# EAGLE board megacommand_1_0_1a (EAGLE 7.6.0)
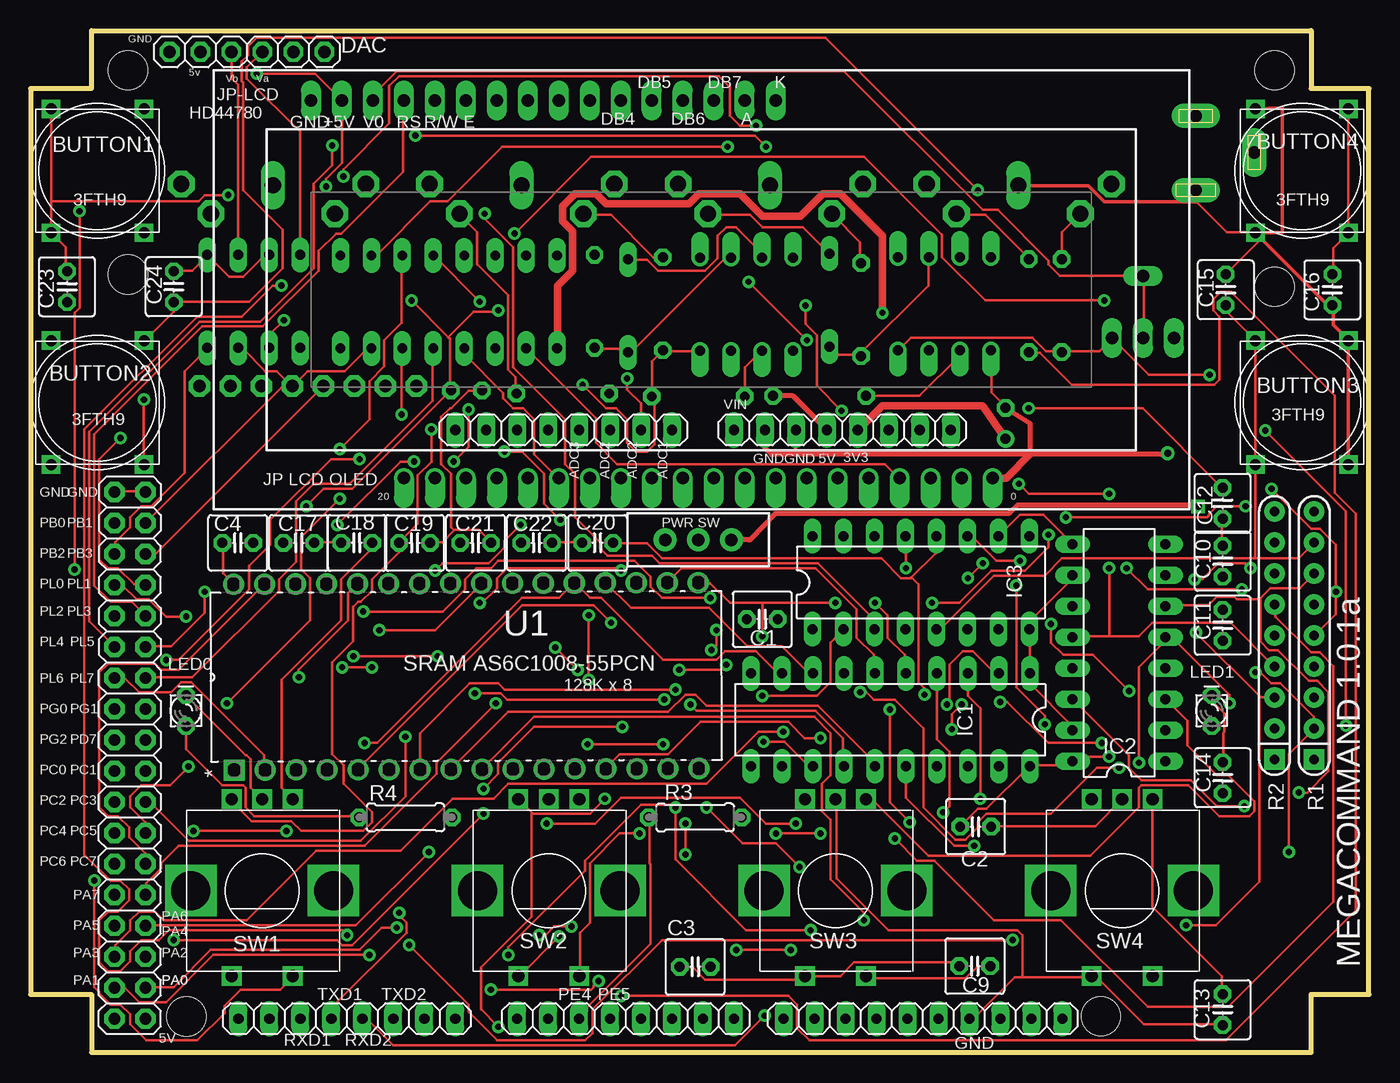
[diagram p0: board, top side]
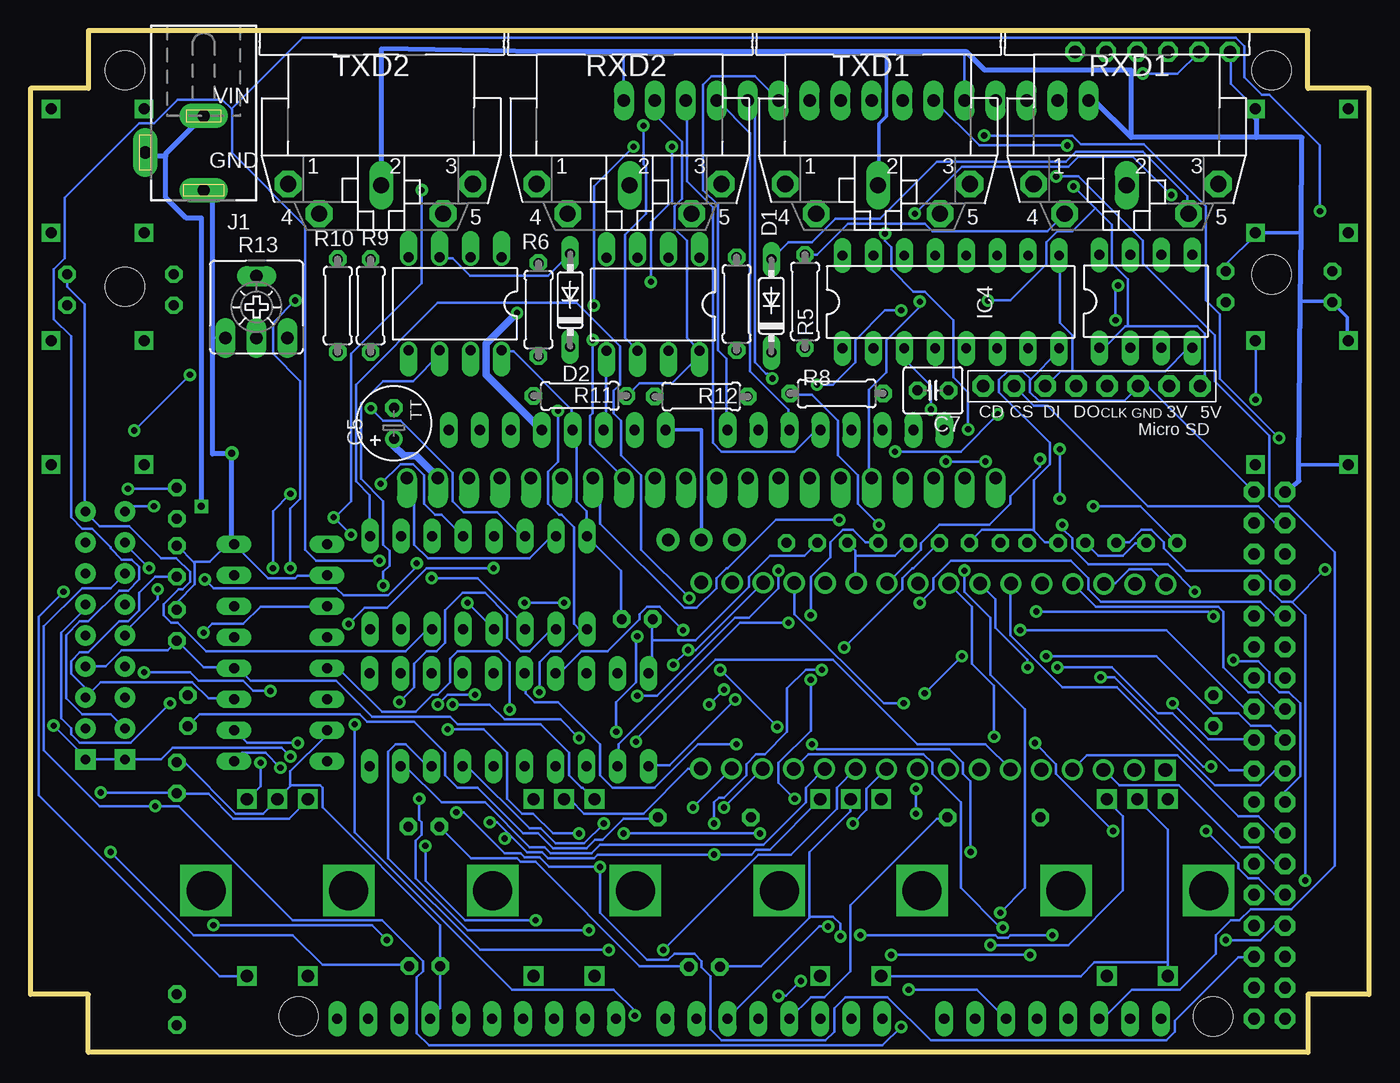
[diagram p1: board, bottom side, seen from below]

Size 109.75 x 83.75 mm. Coordinates in mm from the lower left corner, seen from the top.
Outline: 0,79 0,4.75 5,4.75 5,0 105,0 105,4.75 109.75,4.75 109.75,79 105,79 105,83.75 5,83.75 5,79 0,79
Copper layers (1*16): Top 0.035mm / dielectric 1.5mm / Bottom 0.035mm
Design rules "SparkFun": minimum track width 8mil, minimum drill 20mil, track to track 8mil, track to pad 8mil, pad to pad 8mil, via to via 8mil, smd to smd 8mil, copper to edge 10mil, drill to drill 8mil, minimum pad ring 12mil, minimum via ring 10mil, stop-mask expansion 4mil, vias tented up to drill 25mil, thermal gap 10mil
Net classes: 0 default: width 0.203 mm, drill 0.406 mm, clearance 0.203 mm; 1 power: width 0.61 mm, drill 0.406 mm, clearance 0.203 mm; 2 gnd: width 0.305 mm, drill 0.406 mm, clearance 0.203 mm; 3 power usb: width 0.508 mm, drill 0.406 mm, clearance 0.203 mm
Holes 3.2 mm at 87.77,2.95 12.79,2.92 8,63.75 102,62.75 8,80.5 102,80.5

## Footprints (pad centres in the part's own frame; a part is rotated, then mirrored left to right if it is on the bottom)
1X08 = drill 0.85 pad 1.422 long: 1 -8.89,0; 2 -6.35,0; 3 -3.81,0; 4 -1.27,0; 5 1.27,0; 6 3.81,0; 7 6.35,0; 8 8.89,0
3FT = drill 0.9 square: P$1 5.08,3.81; P$2 -5.08,3.81; P$3 5.08,-3.81; P$4 -5.08,-3.81
C025-050X050 = drill 0.813 octagon: 1 -1.27,0; 2 1.27,0
TT2D6 = drill 0.813: + -1.27,0 | drill 0.813 octagon: - 1.27,0
C025-040X050 = drill 0.813 octagon: 1 -1.27,0; 2 1.27,0
DO35-7 = drill 0.813 long: A 3.81,0; C -3.81,0
1X06 = drill 1.016 octagon: 1 -6.35,0; 2 -3.81,0; 3 -1.27,0; 4 1.27,0; 5 3.81,0; 6 6.35,0
DIL20 = drill 0.813 long: 1 -11.43,-3.81; 2 -8.89,-3.81; 3 -6.35,-3.81; 4 -3.81,-3.81; 5 -1.27,-3.81; 6 1.27,-3.81; 7 3.81,-3.81; 8 6.35,-3.81; 9 8.89,-3.81; 10 11.43,-3.81; 11 11.43,3.81; 12 8.89,3.81; 13 6.35,3.81; 14 3.81,3.81; 15 1.27,3.81; 16 -1.27,3.81; 17 -3.81,3.81; 18 -6.35,3.81; 19 -8.89,3.81; 20 -11.43,3.81
DIL16 = drill 0.813 long: 1 -8.89,-3.81; 2 -6.35,-3.81; 3 -3.81,-3.81; 4 -1.27,-3.81; 5 1.27,-3.81; 6 3.81,-3.81; 7 6.35,-3.81; 8 8.89,-3.81; 9 8.89,3.81; 10 6.35,3.81; 11 3.81,3.81; 12 1.27,3.81; 13 -1.27,3.81; 14 -3.81,3.81; 15 -6.35,3.81; 16 -8.89,3.81
DIL08 = drill 0.813 long: 1 -3.81,-3.81; 2 -1.27,-3.81; 3 1.27,-3.81; 4 3.81,-3.81; 5 3.81,3.81; 6 1.27,3.81; 7 -1.27,3.81; 8 -3.81,3.81
DCJ0202 = drill 1 pad 2 long: 1 0,3.1; 2 4.8,0; 3 0,-3
1X08-BIG = drill 1.016 pad 1.778 octagon: 1 -8.89,0; 2 -6.35,0; 3 -3.81,0; 4 -1.27,0; 5 1.27,0; 6 3.81,0; 7 6.35,0; 8 8.89,0
1X10 = drill 0.85 pad 1.422 long: 1 -11.43,0; 2 -8.89,0; 3 -6.35,0; 4 -3.81,0; 5 -1.27,0; 6 1.27,0; 7 3.81,0; 8 6.35,0; 9 8.89,0; 10 11.43,0
LED_LD260 = drill 0.813 octagon: A -1.27,0; K 1.27,0
DIL08' = drill 0.813 offset: 1 -3.81,-3.81; 2 -1.27,-3.81; 3 1.27,-3.81; 4 3.81,-3.81; 5 3.81,3.81; 6 1.27,3.81; 7 -1.27,3.81; 8 -3.81,3.81
RPACK-SIP-PTH-8 = drill 0.8 pad 1.676 square: P$1 0,0 | drill 0.8 pad 1.676: P$2 0,-2.54; P$3 0,-5.08; P$4 0,-7.62; P$5 0,-10.16; P$6 0,-12.7; P$7 0,-15.24; P$8 0,-17.78; P$9 0,-20.32
0207/7 = drill 0.813 octagon: 1 -3.81,0; 2 3.81,0
CA6V = drill 1.016 long: A -2.54,-2.54; E 2.54,-2.54; S 0,2.54; S1 0,-2.54
SWITCH-SPDT_KIT = drill 1.016 pad 1.88: 1 0,2.718; 2 0,0; 3 0,-2.718
ALPS_EC12E_SW = drill 1 square: A -2.5,-7.5; B 2.5,-7.5; C 0,-7.5; D -2.5,7; E 2.5,7 | drill 3.2 square: GND1 -5.85,0; GND2 5.85,0
DIP254P1524X393-32 = drill 1.118 square: 1 -15.24,38.1 | drill 1.118: 2 -15.24,35.56; 3 -15.24,33.02; 4 -15.24,30.48; 5 -15.24,27.94; 6 -15.24,25.4; 7 -15.24,22.86; 8 -15.24,20.32; 9 -15.24,17.78; 10 -15.24,15.24; 11 -15.24,12.7; 12 -15.24,10.16; 13 -15.24,7.62; 14 -15.24,5.08; 15 -15.24,2.54; 16 -15.24,0; 17 0,0; 18 0,2.54; 19 0,5.08; 20 0,7.62; 21 0,10.16; 22 0,12.7; 23 0,15.24; 24 0,17.78; 25 0,20.32; 26 0,22.86; 27 0,25.4; 28 0,27.94; 29 0,30.48; 30 0,33.02; 31 0,35.56; 32 0,38.1
LCD-16X2-3HOLES = drill 1.016 long: 1 -32,15.5; 2 -29.46,15.5; 3 -26.92,15.5; 4 -24.38,15.5; 5 -21.84,15.5; 6 -19.3,15.5; 7 -16.76,15.5; 8 -14.22,15.5; 9 -11.68,15.5; 10 -9.14,15.5; 11 -6.6,15.5; 12 -4.06,15.5; 13 -1.52,15.5; 14 1.02,15.5; 15 3.56,15.5; 16 6.1,15.5
20PIN = drill 1.016 offset: P$1 -24.13,0; P$2 -21.59,0; P$3 -19.05,0; P$4 -16.51,0; P$5 -13.97,0; P$6 -11.43,0; P$7 -8.89,0; P$8 -6.35,0; P$9 -3.81,0; P$10 -1.27,0; P$11 1.27,0; P$12 3.81,0; P$13 6.35,0; P$14 8.89,0; P$15 11.43,0; P$16 13.97,0; P$17 16.51,0; P$18 19.05,0; P$19 21.59,0; P$20 24.13,0
CP-2350 = drill 1.321 pad 2.184 octagon: 1 7.62,12.58; 3 -7.52,12.58; 4 5.08,15.02; 5 -5.08,15.02 | drill 1.321 long: 2 0,12.68
2X18 = drill 0.95 pad 1.676 octagon: 1 -21.59,-1.27; 2 -21.59,1.27; 3 -19.05,-1.27; 4 -19.05,1.27; 5 -16.51,-1.27; 6 -16.51,1.27; 7 -13.97,-1.27; 8 -13.97,1.27; 9 -11.43,-1.27; 10 -11.43,1.27; 11 -8.89,-1.27; 12 -8.89,1.27; 13 -6.35,-1.27; 14 -6.35,1.27; 15 -3.81,-1.27; 16 -3.81,1.27; 17 -1.27,-1.27; 18 -1.27,1.27; 19 1.27,-1.27; 20 1.27,1.27; 21 3.81,-1.27; 22 3.81,1.27; 23 6.35,-1.27; 24 6.35,1.27; 25 8.89,-1.27; 26 8.89,1.27; 27 11.43,-1.27; 28 11.43,1.27; 29 13.97,-1.27; 30 13.97,1.27; 31 16.51,-1.27; 32 16.51,1.27; 33 19.05,-1.27; 34 19.05,1.27; 35 21.59,-1.27; 36 21.59,1.27

## Placement (x,y rotation side)
ADCL  8x1F-H8.5  [1X08]  43.71,51.01 180 top
BUTTON1  3FT1D  [3FT]  5.5,72.25 270 top
BUTTON2  3FT1D  [3FT]  5.5,53.25 90 top
BUTTON3  3FT1D  [3FT]  104.25,53.25 90 top
BUTTON4  3FT1D  [3FT]  104.25,72.25 90 top
C1  0.1uF  [C025-050X050]  60,35.5 0 top
C2  0.1uF  [C025-050X050]  77.5,18.5 180 top
C3  0.1uF  [C025-050X050]  54.5,7 0 top
C4  0.1uF  [C025-050X050]  17,41.75 180 top
C5  220uF  [TT2D6]  79.95,51.55 90 bottom
C7  0.1uF  [C025-040X050]  35.75,54.25 180 bottom
C9  0.1uF  [C025-050X050]  77.42,7.07 0 top
C10  0.1uF  [C025-050X050]  97.75,40.25 270 top
C11  0.1uF  [C025-050X050]  97.75,35 270 top
C12  0.1uF  [C025-050X050]  97.75,45 90 top
C13  0.1uF  [C025-050X050]  97.75,3.5 90 top
C14  0.1uF  [C025-050X050]  97.75,22.5 270 top
C15  0.1uF  [C025-050X050]  98,62.5 270 top
C16  0.1uF  [C025-050X050]  106.75,62.5 90 top
C17  0.1uF  [C025-050X050]  22,41.75 180 top
C18  0.1uF  [C025-050X050]  26.75,41.75 0 top
C19  0.1uF  [C025-050X050]  31.5,41.75 180 top
C20  0.1uF  [C025-050X050]  46.5,41.75 0 top
C21  0.1uF  [C025-050X050]  36.5,41.75 180 top
C22  0.1uF  [C025-050X050]  41.5,41.75 180 top
C23  0.1uF  [C025-050X050]  3,62.75 90 top
C24  0.1uF  [C025-050X050]  11.75,62.75 270 top
COMMUNICATION  8x1F-H8.5  [1X08]  25.93,2.75 0 top
D1  1N4148  [DO35-7]  49,61.18 90 bottom
D2  1N4148  [DO35-7]  65.5,61.66 90 bottom
DAC  [1X06]  17.75,82 180 top
IC1  74HC573N  [DIL20]  70.5,27.25 180 top
IC2  74LS165N  [DIL16]  89.25,32.75 90 top
IC3  74LS165N  [DIL16]  73,38.5 0 top
IC4  HC4050  [DIL16]  34.3,61.5 0 bottom
IC6  MCP4822  [DIL08]  18.3,61.55 0 bottom
J1  DCJ0202  [DCJ0202]  95.55,73.75 180 bottom
JP1  [1X08-BIG]  22.74,54.61 180 bottom
JP6  10x1F-H8.5  [1X10]  73.17,2.75 180 top
LED0  5mm LED  [LED_LD260]  12.75,28 90 top
LED1  5mm LED  [LED_LD260]  96.85,28 90 top
OK1  6N137  [DIL08']  58.7,61.3 180 bottom
OK2  6N137  [DIL08']  74.95,61.35 180 bottom
POWER  8x1F-H8.5  [1X08]  66.57,51.01 180 top
PWML  8x1F-H8.5  [1X08]  48.79,2.75 0 top
R1  4609X-AP1-103LF  [RPACK-SIP-PTH-8]  105.25,24 180 top
R2  10K 4609X-AP1-103LF  [RPACK-SIP-PTH-8]  102,24 180 top
R3  220  [0207/7]  54.5,19.25 0 top
R4  220  [0207/7]  30.75,19.25 180 top
R5  220  [0207/7]  46.25,61.55 270 bottom
R6  220  [0207/7]  68.1,60.88 270 bottom
R7  220  [0207/7]  51.85,61.35 270 bottom
R8  220  [0207/7]  43.65,54 180 bottom
R9  220  [0207/7]  81.86,61.2 270 bottom
R10  220  [0207/7]  84.55,61.2 270 bottom
R11  1k  [0207/7]  64.7,53.8 0 bottom
R12  1k  [0207/7]  54.75,53.75 0 bottom
R13  10k  [CA6V]  91.21,61.08 0 bottom
S1  EG1218  [SWITCH-SPDT_KIT]  54.75,42 90 top
SW1  PEC11  [ALPS_EC12E_SW]  19,13.25 180 top
SW2  PEC11  [ALPS_EC12E_SW]  42.5,13.25 180 top
SW3  PEC11  [ALPS_EC12E_SW]  66,13.25 180 top
SW4  PEC11  [ALPS_EC12E_SW]  89.5,13.25 180 top
U1  [DIP254P1524X393-32]  54.75,38.5 90.2 top
U$1  LCD-HD4478016X2-3-HOLES  [LCD-16X2-3HOLES]  55,62.5 0 top
U$2  20PIN  [20PIN]  54.75,47.06 180 top
U$7  MIDIJACK  [CP-2350]  81,83.75 180 bottom
U$8  MIDIJACK  [CP-2350]  60.62,83.75 180 bottom
U$9  MIDIJACK  [CP-2350]  40.25,83.75 180 bottom
U$10  MIDIJACK  [CP-2350]  19.88,83.75 180 bottom
XIO  18x2F-H8.5  [2X18]  8.15,24.34 90 top

## Library data of the parts
ADCL COMMUNICATION JP6 POWER PWML XIO = SmartPrj
BUTTON1-BUTTON4 = mec switches
C1-C4 C7 C9-C24 = rcl
C5 R3-R12 = resistor
D1 D2 = diode
DAC JP1 = adafruit
IC1-IC3 = 74xx-us
IC4 = 45xx
IC6 = dac
J1 = con-jack; OC_FARNELL: unknown; OC_NEWARK: unknown
LED0 LED1 = eagle-ltspice; SPICEMODEL: NONE; SPICEPREFIX: D; SPICETYPE: diode
OK1 OK2 = optocoupler; MPN: 6N137; OC_FARNELL: 1328376; OC_NEWARK: 52M1895
R1 R2 = SparkFun-Resistors
R13 = pot
S1 = SparkFun-Electromechanical; PROD_ID: SWCH-08261
SW1-SW4 = pec11-n; MPN: EC12E2424407; OC_FARNELL: 1520813; OC_NEWARK: 74M1068
U1 = Alliance_Memory_By_element14_Batch_1; MPN: AS6C1008-55PCN; OC_FARNELL: 1562896; OC_NEWARK: 94M6214; PACKAGE: DIP-32; SUPPLIER: ALLIANCE MEMORY
U$1 = HD44780LCD
U$2 = OLED2
U$7-U$10 = adafruit_din

## Nets
+3V3 [power]: C5.+ IC4.1 POWER.4 U$2.P$2
+5V: C1.2 C2.2 C3.2 C4.2 C7.1 DAC.5 IC1.20 IC2.16 IC3.16 IC6.1 JP1.1 OK1.8 OK2.8 POWER.5 R1.P$1 R2.P$1 R7.2 R10.2 R11.2 R12.2 R13.E U1.30 U1.32 U$1.2 U$1.15
ADC0: ADCL.1 U$1.11
ADC1: ADCL.2 U$1.12
ADC2: ADCL.3 U$1.13
ADC3: ADCL.4 U$1.14
ADC4: ADCL.5
ADC5: ADCL.6
ADC6: ADCL.7
ADC7: ADCL.8
AREF: JP6.3
CD: JP1.8
GND: BUTTON1.P$1 BUTTON1.P$2 BUTTON2.P$1 BUTTON2.P$2 BUTTON3.P$3 BUTTON3.P$4 BUTTON4.P$1 BUTTON4.P$2 C1.1 C2.1 C3.1 C4.1 C5.- C7.2 C9.1 C10.1 C11.1 C12.1 C13.1 C14.1 C15.1 C16.1 C17.1 C18.1 C19.1 C20.1 C21.1 C22.1 C23.1 C24.1 DAC.6 IC1.1 IC1.10 IC2.8 IC2.10 IC2.15 IC3.8 IC3.15 IC4.8 IC6.5 IC6.7 J1.1 JP1.3 JP6.4 LED0.K LED1.K OK1.5 OK2.5 POWER.6 POWER.7 R13.A SW1.C SW1.E SW2.C SW2.E SW3.C SW3.E SW4.C SW4.E U1.16 U1.22 U$1.1 U$1.5 U$1.16 U$2.P$1 U$7.2 U$9.2 XIO.35 XIO.36
INS0: C18.2 IC2.11 R2.P$3 SW1.A
INS1: C19.2 IC2.12 R2.P$4 SW1.B
INS2: C21.2 IC2.13 R2.P$6 SW2.A
INS3: C22.2 IC2.14 R2.P$7 SW2.B
INS4: C10.2 IC2.3 R1.P$3 SW3.A
INS5: C11.2 IC2.4 R1.P$4 SW3.B
INS6: C13.2 IC2.5 R1.P$6 SW4.A
INS7: C14.2 IC2.6 R1.P$7 SW4.B
INS8: C17.2 IC3.11 R2.P$2 SW1.D
INS9: C20.2 IC3.12 R2.P$5 SW2.D
INS10: C9.2 IC3.13 R1.P$2 SW3.D
INS11: C12.2 IC3.14 R1.P$5 SW4.D
INS12: BUTTON1.P$3 BUTTON1.P$4 C23.2 IC3.3 R2.P$8
INS13: BUTTON2.P$3 BUTTON2.P$4 C24.2 IC3.4 R2.P$9
INS14: BUTTON3.P$1 BUTTON3.P$2 C15.2 IC3.5 R1.P$8
INS15: BUTTON4.P$3 BUTTON4.P$4 C16.2 IC3.6 R1.P$9
N$1: R8.1 U$9.5
N$2: JP6.2
N$3: LED0.A R4.2
N$4: IC1.13 U1.6
N$5: IC1.19 U1.12
N$6: IC1.18 U1.11
N$7: IC1.17 U1.10
N$8: IC1.16 U1.9
N$9: IC1.15 U1.8
N$10: IC1.14 U1.7
N$11: IC1.12 U1.5
N$12: IC2.9 IC3.10
N$13: LED1.A R3.2
N$14: D1.A OK1.3 U$10.5
N$15: R5.1 U$10.4
N$16: R7.1 U$9.4
N$17: R10.1 U$7.4
N$18: D2.C OK2.2 R6.2
N$19: D2.A OK2.3 U$8.5
N$20: DAC.3 IC6.8
N$21: R6.1 U$8.4
N$22: R9.1 U$7.5
N$23: J1.2 J1.3 S1.3
N$24: DAC.4 IC6.6
N$25: IC4.2 U$2.P$4
N$26: D1.C OK1.2 R5.2
N$27: R13.S R13.S1 U$1.3
N$28: IC4.6 U$2.P$7
N$29: IC4.10 U$2.P$8
N$30: IC4.4 U$2.P$15
N$31: IC4.12 U$2.P$16
PA0: IC1.2 U1.13 XIO.3
PA1: IC1.3 U1.14 XIO.4
PA2: IC1.4 U1.15 XIO.5
PA3: IC1.5 U1.17 XIO.6
PA4: IC1.6 U1.18 XIO.7
PA5: IC1.7 U1.19 XIO.8
PA6: IC1.8 U1.20 XIO.9
PA7: IC1.9 U1.21 XIO.10
PB0: JP1.7 XIO.34
PB1: IC4.7 IC6.3 JP1.4 XIO.33
PB2: IC4.9 IC6.4 JP1.6 XIO.32
PB3: JP1.5 XIO.31
PB4: JP6.8
PB5: JP6.7
PB6: JP6.6
PB7: JP6.5
PC0: U1.27 XIO.18
PC1: U1.26 XIO.17
PC2: U1.23 XIO.16
PC3: U1.25 XIO.15
PC4: U1.4 XIO.14
PC5: U1.28 XIO.13
PC6: U1.3 XIO.12
PC7: U1.31 XIO.11
PD0: COMMUNICATION.1
PD1: COMMUNICATION.2
PD7: IC4.11 XIO.19
PE0: PWML.1
PE1: PWML.2
PE3: IC6.2 PWML.6
PE4: PWML.3 R3.1
PE5: PWML.4 R4.1
PG0: U1.29 XIO.22
PG1: U1.24 XIO.21
PG2: IC1.11 XIO.20
PG5: PWML.5
PH3: PWML.7
PH4: PWML.8
PH5: JP6.10
PH6: JP6.9
PL0: IC3.9 XIO.30
PL1: IC2.1 IC3.1 XIO.29
PL2: IC2.2 IC3.2 XIO.28
PL3: U$1.4 XIO.27
PL4: U$1.6 XIO.26
PL5: IC4.3 XIO.25
PL6: U1.2 XIO.24
PL7: IC4.5 XIO.23
RESET: POWER.3
RXD1: COMMUNICATION.3 OK1.6 R12.1
RXD2: COMMUNICATION.5 OK2.6 R11.1
RXD3: COMMUNICATION.7
SCL: JP6.1
TXD1: COMMUNICATION.4 R8.2
TXD2: COMMUNICATION.6 R9.2
TXD3: COMMUNICATION.8
VDD: IC4.16
VIN: POWER.8 S1.2

## Tracks (layer width: path | path; a pad name or v marks a point on that pad's centre or on a via)
+3V3  (via drill 0.51)
  Top 0.61: POWER.4 67.92,51.06 69.85,52.99 77.94,52.99 arc-45 78.12,52.91 C5.+ | v69.85,60.61 69.85,66.91 66.4,70.36 64.98,70.36 63.15,68.53 60,68.53 58.17,70.36 54.82,70.36 54,69.55 47.2,69.55 46.38,70.36 44.66,70.36 43.64,69.35 43.64,68.13 44.45,67.31 44.45,64.06 43.23,62.84 43.23,57.76 IC4.1
  Bottom 0.61: U$2.P$2 76.38,47.12 78.12,48.88 79.12,48.88 80,49.75 80,50.25 C5.+ | v69.85,60.61 72.39,58.07 72.39,55.53 67.92,51.06 POWER.4
+5V  (via drill 0.51)
  Top 0.203: C2.2 76.25,18.55 77.68,19.97 78.39,19.97 81.84,23.42 IC1.20 81.94,23.52 85.09,23.52 85.4,23.83 IC2.16 85.5,23.93 85.81,24.24 v88.45,24.24 | C4.2 15.8,41.71 15.8,39.27 16.62,38.46 U1.32 | v22.61,44.76 24.03,46.18 26.37,46.18 34.4,54.21 C7.1 34.4,54.31 34.4,58.48 34.24,58.63 | v18.55,80.22 23.32,80.22 25.45,78.08 U$1.2 25.56,77.98 25.56,72.9 24.24,71.58 v24.24,70.97 | v31.25,61.62 34.24,58.63 | OK1.8 54.82,57.46 51.87,57.46 R7.2 51.77,57.46 50.96,56.65 50.96,53.8 R12.2 50.96,53.7 51.16,53.5 51.16,49.84 50.55,49.23 49.64,49.23 48.92,49.94 48.92,51.87 48.01,52.78 47.2,52.78 v45.27,54.72 | OK2.8 71.17,57.56 72.19,58.58 82.15,58.58 83.27,57.46 84.48,57.46 R10.2 84.59,57.46 87.63,57.46 88.65,58.48 R13.E 88.75,58.48 91.7,55.53 v96.68,55.53 | 34.24,58.63 36.33,60.71 38.26,60.71 v38.36,60.81 | v107.85,26.78 107.85,44.35 v101.25,50.96
  Top 0.406: POWER.5 62.51,53.8 R11.2
  Bottom 0.203: C3.2 55.83,7.07 59.8,7.07 68.33,15.6 69.55,15.6 69.85,15.9 73.61,15.9 76.15,18.44 C2.2 | v88.45,24.24 89.16,24.95 98.1,24.95 99.01,24.03 101.96,24.03 R2.P$1 102.06,24.03 105.21,24.03 R1.P$1 105.21,24.13 v107.85,26.78 | v22.61,44.76 18.75,44.76 15.8,41.81 C4.2 | U1.30 21.7,38.46 20.78,38.46 19.66,39.58 17.84,39.58 16.72,38.46 U1.32 | 19.77,59.49 14.08,59.49 13.47,58.88 13.47,54.92 13.77,54.61 JP1.1 | 19.77,59.49 19.97,59.49 21.7,57.76 22.1,57.76 IC6.1 | v18.55,80.22 15.7,80.22 13.97,81.94 DAC.5 | 19.77,59.49 19.77,63.35 21.09,64.67 21.09,67.82 22.46,69.19 | v24.24,70.97 22.46,69.19 | v31.25,61.62 29.42,61.62 26.47,64.57 26.47,66.4 25.56,67.31 24.34,67.31 22.46,69.19 | U$1.15 58.48,77.98 58.48,76.76 56.34,74.63 56.34,69.96 56.95,69.35 56.95,67.52 55.94,66.5 55.94,58.58 54.92,57.56 OK1.8 54.92,57.46 54.92,57.05 57.15,54.82 59.8,54.82 60.81,53.8 R11.2 | C1.2 61.32,35.51 61.32,39.48 64.06,42.22 IC3.16 64.16,42.32 64.16,44.35 64.98,45.16 64.98,50.65 65.28,50.96 POWER.5 65.38,51.06 65.38,52.68 70.16,57.46 71.07,57.46 OK2.8 | v38.36,60.81 39.68,60.81 42.12,58.37 42.12,56.54 43.95,54.72 v45.27,54.72 | v96.68,55.53 v101.25,50.96
ADC0
  Bottom 0.203: ADCL.1 52.68,51.06 52.68,56.85 53.4,57.56 53.4,69.45 54.61,70.67 54.61,79.3 53.9,80.01 50.35,80.01 48.42,78.08 U$1.11
ADC1  (via drill 0.51)
  Top 0.203: v48.92,55.22 48.92,54.31 50.04,53.19 50.04,51.06 ADCL.2
  Bottom 0.203: v48.92,55.22 49.33,55.63 49.43,55.63 50.35,56.54 50.35,77.47 50.85,77.98 U$1.12
ADC2
  Bottom 0.203: ADCL.3 47.6,51.06 47.6,52.68 50.75,55.83 50.75,75.34 53.4,77.98 U$1.13
ADC3
  Bottom 0.203: ADCL.4 45.06,50.96 45.37,50.96 47.1,49.23 53.09,49.23 53.8,49.94 53.8,69.24 55.94,71.38 55.94,77.98 U$1.14
GND  (via drill 0.51, 0.6)
  Top 0.203: 97.69,43.64 C12.1 97.69,43.54 97.69,41.61 C10.1 | XIO.35 9.3,45.98 6.96,45.98 XIO.36 | C22.1 42.83,41.81 45.16,41.81 C20.1 | LED0.K 12.76,29.21 17.63,24.34 17.73,24.34 18.04,24.03 18.04,21.7 18.95,20.78 SW1.C | C3.1 53.29,6.96 54.31,6.96 55.33,5.95 63.25,5.95 63.45,6.15 SW3.E 63.55,6.25 66.4,6.25 67.52,7.37 75.85,7.37 76.05,7.17 C9.1 | C13.1 97.69,2.29 91.29,2.29 87.43,6.15 87.02,6.15 SW4.E 86.92,6.15 81.33,6.15 | 81.33,6.15 80.72,6.15 77.37,2.8 77.07,2.8 JP6.4 | 81.33,6.15 81.33,9.61 80.93,10.01 70.36,10.01 66.09,14.28 66.09,20.68 SW3.C | v43.34,9.5 40.09,6.25 SW2.E | C18.1 25.45,41.81 23.32,41.81 C17.1 | 34.75,42.78 34.8,42.83 36.73,42.83 37.75,41.81 C21.1 | 34.75,42.78 33.79,41.81 32.77,41.81 C19.1 | 34.75,42.78 34.5,43.03 34.5,47.4 33.68,48.21 33.68,52.07 34.4,52.78 34.5,52.78 35.92,54.21 36.94,54.21 C7.2 | IC2.15 85.4,26.47 85.4,26.78 81.94,30.23 81.94,31.04 IC1.1 81.94,31.14 81.94,34.6 IC3.8 81.94,34.7 81.94,35.31 85.4,38.76 85.4,39.07 IC2.10 | C14.1 97.79,23.83 97.79,26.17 97.9,26.27 97.9,27.79 96.88,28.81 96.88,29.21 LED1.K | C2.1 78.8,18.55 87.33,18.55 89.46,20.68 SW4.C | C24.1 11.84,64.06 13.26,64.06 14.48,65.28 IC6.5 14.58,65.28 16.31,63.55 17.43,63.55 19.16,65.28 19.56,65.28 IC6.7 | C15.1 98.1,63.86 100.84,66.6 BUTTON4.P$2 100.33,67.21 98.1,67.21 95.66,69.65 J1.1 | OK2.5 78.8,57.46 78.8,54.11 79.91,52.99 C5.-
  Top 0.305: 59.8,51.61 60.2,51.21 POWER.7 | 62.74,49 62.74,51 POWER.6 | BUTTON3.P$4 108.06,48.26 108.06,58.22 BUTTON3.P$3 108.06,58.42 106.84,59.64 106.84,61.16 C16.1 106.63,61.27 106.33,61.27 100.54,67.06 BUTTON4.P$2 102.64,67.16 102.64,77.42 BUTTON4.P$1 | U$7.2 81.03,71.02 86.72,71.02 88.04,69.7 95.55,69.7 J1.1
  Top 0.406: v93.25,49.1 92.75,49 81.95,49 | 81.95,49 62.74,49 60.75,49 60.22,49.53 POWER.7 | C5.- 81.95,51.55 81.95,49
  Top 0.61: 81.95,49 80.08,47.13 arc-45 79.91,47.06 U$2.P$1
  Bottom 0.203: 33.18,82 33.18,78.08 U$1.5 | 61.12,82 61.12,78.08 U$1.16 | 97.69,43.74 C12.1 | 16.51,7.37 16.51,18.24 18.95,20.68 SW1.C | 16.51,7.37 16.51,6.25 SW1.E | 16.51,7.37 22.51,7.37 23.63,6.25 39.98,6.25 SW2.E | 45.88,11.13 45.88,11.03 49.84,7.07 53.19,7.07 C3.1 | 45.88,11.13 45.88,16.41 42.52,19.77 42.52,20.68 SW2.C | SW3.C 65.99,20.68 65.48,20.68 64.37,19.56 59.49,19.56 55.83,23.22 54.82,23.22 U1.16 | JP6.4 76.97,2.8 76.15,3.61 C9.1 76.15,7.17 76.15,10.42 85.81,20.07 85.81,21.7 86.01,21.9 88.45,21.9 | v43.34,9.5 43.34,10.52 43.95,11.13 45.88,11.13 | C4.1 18.34,41.71 19.16,41.71 20.17,40.7 22.2,40.7 23.22,41.71 C17.1 | 58.78,33.79 58.78,31.35 58.98,31.14 IC1.10 | 58.78,33.79 58.78,35.41 C1.1 | 42.12,40.7 42.12,41.1 42.73,41.71 C22.1 | 42.12,40.7 42.12,38.46 U1.22 | 42.12,40.7 38.87,40.7 37.85,41.71 C21.1 | 58.78,33.79 55.22,33.79 50.85,38.16 50.85,38.97 49.13,40.7 46.28,40.7 45.27,41.71 C20.1 | 27.54,42.78 27.59,42.83 31.75,42.83 32.77,41.81 C19.1 | 27.54,42.78 26.57,41.81 25.56,41.81 C18.1 | C14.1 97.69,23.73 97.08,23.73 92.92,19.56 90.68,19.56 89.56,20.68 SW4.C 89.46,20.78 88.45,21.8 88.45,21.9 | 88.45,21.9 88.45,23.02 85.5,25.96 85.5,26.37 IC2.15 | 27.74,55.17 27.79,55.12 27.79,54.11 27.08,53.4 20.07,53.4 18.95,54.51 JP1.3 18.85,54.51 18.04,54.51 9.5,45.98 XIO.35 | 27.74,55.17 25.45,57.46 25.45,57.66 IC4.8 | 96.32,40.14 97.69,41.51 C10.1 | 96.32,40.14 96.27,40.09 96.27,38.36 97.69,36.94 97.69,36.33 C11.1 | IC3.15 66.7,42.22 67.11,42.22 68.84,40.49 77.17,40.49 78.29,41.61 78.29,46.49 78.8,46.99 U$2.P$1 | OK1.5 62.54,57.46 62.54,51.26 62.74,51.06 POWER.6 | IC2.8 93.12,41.71 93.25,41.83
  Bottom 0.203: DAC.6 11.33,81.94 11.33,79.4 9.4,77.47 BUTTON1.P$2 | 94.85,58.58 93.83,58.58 R13.A | 96.32,40.14 96.27,40.19 95.05,40.19 93.42,41.81 IC2.8 | C24.1 11.74,64.06 11.74,64.57 9.3,67.01 BUTTON1.P$1 | IC2.10 85.5,39.07 87.84,39.07 88.04,38.87 90.28,38.87 93.02,41.61 IC2.8 | 27.74,55.17 28.4,55.83 29.62,55.83 30.33,55.12 30.33,54.11 26.17,49.94 26.17,48.21 27.49,46.89 27.49,42.83 27.54,42.78
  Bottom 0.305: 5.62,61.57 5.44,61.57 3,61.57 C23.1 2.9,61.37 1.78,60.25 1.78,58.42 BUTTON2.P$1 | BUTTON2.P$2 1.78,48.16 5.54,48.16 5.74,48.16 | 39.58,82 39.58,76.71 40.19,76.1 40.19,71.12 U$9.2 | BUTTON1.P$1 9.3,67.16 5.74,67.16 5.57,67.16
  Bottom 0.406: XIO.36 5.75,46.81 5.74,48.16 5.62,61.57 5.57,67.16 5.5,75 9.25,75 | 9.25,75 19.5,75 | 19.5,75 22.5,78 U$1.1 | BUTTON1.P$2 9.5,77.14 9.5,76.75 9.25,76.5 9.25,75 | U$7.2 81,82.25 67.75,82 61.12,82 39.58,82 33.18,82 33,82 31.5,80.5 19.5,80.5 19.5,75 | 93.25,41.83 v93.25,49.1 94.8,49.1 94.85,49.05 94.85,58.58 94.85,69.95 J1.1
INS0  (via drill 0.51)
  Top 0.203: 100.79,29.16 100.84,29.11 101.96,29.11 R2.P$3 | 100.79,29.16 v95.56,34.4 | C18.2 28,41.71 28,41.3 25.45,38.76 25.45,35.41 20.58,30.54 20.58,21.7 21.49,20.78 SW1.A | v94.75,10.42 97.18,10.42 100.74,13.97 100.74,29.11 100.79,29.16 | v80.52,9.2 51.77,9.2 46.08,3.51 46.08,1.58 45.47,0.97 38.26,0.97 35.92,3.31 35.92,3.92 v31.04,8.79
  Bottom 0.203: v95.56,34.4 94.85,35.11 92.31,35.11 90.89,36.53 85.5,36.53 IC2.11 | v94.75,10.42 81.74,10.42 v80.52,9.2 | v31.04,8.79 24.64,8.79 20.17,13.26 20.17,19.36 21.49,20.68 SW1.A
INS1  (via drill 0.51)
  Top 0.203: 88.45,34.09 90.89,34.09 92,35.21 98.4,35.21 101.96,31.65 R2.P$4 | 88.45,34.09 85.5,34.09 IC2.12 | SW1.B 16.41,20.68 18.14,18.95 21.39,18.95 22.2,18.14 27.28,18.14 28,18.85 28,19.66 25.66,22 25.66,23.52 24.74,24.44 24.74,31.96 26.47,33.68 26.47,36.53 26.88,36.94 27.08,36.94 28,37.85 28,38.76 30.23,41 30.23,41.71 C19.2 30.23,41.81 31.75,43.34 31.75,47.3 32.87,48.42 v32.87,51.06 | v88.45,39.68 88.45,34.09 | v88.04,61.62 78.29,61.62 74.73,65.18 74.73,67.01 68.33,73.41 45.98,73.41 v39.68,67.11
  Bottom 0.203: v88.45,39.68 88.45,44.56 87.63,45.37 87.63,55.02 89.87,57.26 89.87,59.8 v88.04,61.62 | v39.68,67.11 39.68,66.5 39.17,65.99 39.17,64.16 37.34,62.34 36.43,62.34 34.09,60 34.09,55.33 32.87,54.11 v32.87,51.06
INS2  (via drill 0.51)
  Top 0.203: v44.86,31.35 v43.03,33.18 | v53.7,16.21 v53.7,18.75 | v70.46,28.1 70.46,20.48 v72.09,18.85 | v70.87,17.53 72.7,15.7 74.12,15.7 79,10.82 84.48,10.82 91.6,3.71 98.2,3.71 106.84,12.35 106.84,31.65 105.72,32.77 105.01,32.77 102.06,35.72 102.06,36.63 R2.P$6
  Bottom 0.203: v43.03,33.18 38.26,37.95 38.26,38.87 37.44,39.68 37.34,39.68 35.31,41.71 C21.2 | v44.86,31.35 46.18,31.35 47.7,29.82 47.7,26.27 49.53,24.44 50.24,24.44 51.06,23.63 51.06,22.71 52.89,20.88 53.29,20.88 53.7,20.48 v53.7,18.75 | SW2.A 45.06,20.68 49.13,16.62 50.24,16.62 50.65,16.21 v53.7,16.21 63.25,16.21 63.55,15.9 67.31,15.9 67.82,16.41 69.04,16.41 70.51,17.89 | v70.46,28.1 70.46,31.96 71.38,32.87 74.73,32.87 75.34,32.26 75.34,30.33 76.36,29.32 76.76,29.32 78.19,27.89 80.93,27.89 84.48,31.45 85.4,31.45 IC2.13 | v72.09,18.85 71.48,18.85 70.51,17.89 | 70.51,17.89 v70.87,17.53
INS3  (via drill 0.51)
  Top 0.203: v45.77,30.54 v45.77,35.82 | v47.1,20.78 45.88,19.56 41.2,19.56 41.15,19.61 | 41.15,19.61 40.09,20.68 SW2.B | v99.52,20.17 97.29,20.17 95.15,22.3 91.09,22.3 90.07,23.32 90.07,24.34 85.5,28.91 IC2.14 | v38.36,2.09 36.94,3.51 36.94,6.96 41.1,11.13 41.1,19.56 41.15,19.61
  Bottom 0.203: v45.77,35.82 45.77,38.97 44.15,40.59 44.15,41.81 43.13,42.83 42.32,42.83 41.3,41.81 40.29,41.81 C22.2 | v45.77,30.54 45.77,26.37 48.42,23.73 48.42,22.1 v47.1,20.78 | R2.P$7 102.06,39.17 103.18,38.05 105.52,38.05 108.67,34.9 108.67,24.74 104.09,20.17 v99.52,20.17 97.59,20.17 88.24,10.82 80.93,10.82 77.58,7.47 77.58,6.66 78.08,6.15 78.08,1.58 77.07,0.56 39.88,0.56 v38.36,2.09
INS4
  Top 0.203: SW3.A 68.53,20.68 69.04,20.68 73.61,16.11 86.92,16.11 90.89,20.07 90.89,21.7 91.09,21.9 94.95,21.9 97.49,19.36 99.93,19.36 100.33,19.77 100.33,20.58 98.2,22.71 97.29,22.71 94.85,25.15 94.85,27.18 93.12,28.91 IC2.3
  Bottom 0.203: IC2.3 93.12,29.01 95.15,29.01 96.47,30.33 103.99,30.33 105.21,29.11 R1.P$3 104.91,29.52 106.43,31.04 106.43,32.06 105.72,32.77 105.01,32.77 102.47,35.31 101.76,35.31 100.84,36.22 100.84,37.65 99.52,38.97 97.79,38.97 C10.2
INS5
  Bottom 0.203: SW3.B 63.55,20.78 64.47,21.7 64.57,21.7 65.59,22.71 65.59,24.54 67.92,26.88 74.73,26.88 75.34,27.49 81.74,27.49 84.69,30.43 91.7,30.43 92.71,31.45 93.02,31.45 IC2.4 93.12,31.55 95.56,31.55 97.69,33.68 C11.2 97.79,33.68 98.5,32.97 102.26,32.97 103.58,31.65 105.21,31.65 R1.P$4
INS6  (via drill 0.51)
  Top 0.203: v90.89,23.73 90.89,31.55 93.02,33.68 93.02,33.99 IC2.5 93.02,33.58 94.03,33.58 98.3,29.32 v98.3,28.6 | C13.2 97.69,4.83 97.69,6.25 92,11.94 92,20.68 SW4.A
  Bottom 0.203: v90.89,23.73 90.89,21.8 91.9,20.78 SW4.A | v98.3,28.6 101.55,25.35 105.72,25.35 106.43,26.06 106.43,26.57 107.24,27.39 107.24,34.4 105.31,36.33 105.31,36.63 R1.P$6
INS7  (via drill 0.51)
  Top 0.203: 100.79,37.19 101.66,38.05 104.09,38.05 105.21,39.17 R1.P$7 | 100.79,37.19 100.74,37.14 98.91,37.14 98.71,37.34 97.29,37.34 96.58,36.63 93.12,36.63 IC2.6 | v103.99,21.29 104.7,21.29 106.43,23.02 106.43,29.52 105.52,30.43 104.8,30.43 102.26,32.97 101.55,32.97 100.84,33.68 100.84,37.14 100.79,37.19
  Bottom 0.203: SW4.B 87.02,20.68 88.55,19.16 93.12,19.16 95.15,21.19 97.69,21.19 C14.2 97.79,21.29 v103.99,21.29
INS8  (via drill 0.51)
  Top 0.203: v5.24,14.08 5.24,5.34 5.64,4.93 5.64,4.83 6.56,3.92 7.37,3.92 8.18,3.1 8.18,2.29 9.5,0.97 13.67,0.97 15.9,3.2 15.9,3.81 17.23,5.13 20.48,5.13 21.49,6.15 SW1.D | v81.13,40.29 79.2,40.29 77.27,42.22 76.86,42.22 IC3.11 | v3.61,39.58 3.61,60.61 4.02,61.02 v4.02,68.94
  Bottom 0.203: 6.3,36.88 5.24,35.82 v5.24,14.08 | 6.3,36.88 6.35,36.94 7.17,36.94 8.08,37.85 8.08,38.66 8.89,39.48 14.99,39.48 16.82,41.3 16.82,41.81 17.84,42.83 18.65,42.83 19.66,41.81 20.68,41.81 C17.2 | v81.13,40.29 86.31,40.29 87.23,41.2 87.23,67.72 93.22,73.72 93.22,77.27 93.27,77.32 | 93.27,77.32 94.03,78.08 97.69,78.08 99.62,76.15 100.84,76.15 106.94,70.06 106.94,65.08 107.85,64.16 107.85,60.1 106.43,58.68 106.43,43.84 105.52,42.93 104.7,42.93 103.18,41.41 103.18,41.3 102.26,40.39 101.45,40.39 100.84,39.78 100.84,38.76 101.76,37.85 102.47,37.85 105.01,35.31 105.72,35.31 106.84,34.19 106.84,29.01 105.52,27.69 103.18,27.69 102.06,26.57 R2.P$2 | v3.61,39.58 6.3,36.88 | v4.02,68.94 4.02,74.32 8.18,78.49 8.79,78.49 10.21,79.91 10.21,82.45 10.93,83.16 87.43,83.16 93.27,77.32
INS9  (via drill 0.51)
  Top 0.203: 72.24,38.92 74.22,40.9 74.22,42.22 IC3.12 | 72.24,38.92 72.19,38.87 71.38,38.87 69.75,40.49 51.77,40.49 50.55,41.71 47.81,41.71 C20.2 | v49.94,17.94 48.31,17.94 45.88,15.5 45.88,10.62 45.06,9.81 45.06,6.25 SW2.D | v64.77,17.94 v61.12,17.94 | v75.54,26.47 75.54,27.69 v76.36,28.5 | v73.31,29.32 73.31,29.82 72.8,30.33 72.8,38.36 72.24,38.92 | v99.32,37.95 91.6,37.95 v89.87,39.68 | v88.45,45.77 81.84,45.77 v81.03,46.59
  Bottom 0.203: v61.12,17.94 v49.94,17.94 | v64.77,17.94 66.91,17.94 68.53,19.56 69.45,19.56 70.67,20.78 70.67,24.54 72.6,26.47 v75.54,26.47 | v76.36,28.5 75.54,29.32 v73.31,29.32 | v99.32,37.95 99.32,37.14 101.96,34.5 101.96,34.19 R2.P$5 | v89.87,39.68 89.87,44.35 v88.45,45.77 | v81.03,46.59 79.4,48.21 78.39,48.21 77.47,47.3 77.47,44.96 76.56,44.05 76.05,44.05 74.32,42.32 IC3.12
INS10  (via drill 0.51)
  Top 0.203: C9.2 78.59,7.07 77.68,7.07 76.66,6.05 68.64,6.05 68.53,6.15 SW3.D | v71.78,39.68 71.78,42.22 IC3.13 | v83.67,35.11 83.67,33.58 84.69,32.57 87.13,32.57 v90.07,29.62 | v100.44,31.14 100.84,31.14 101.76,30.23 102.47,30.23 105.21,27.49 105.21,26.57 R1.P$2 105.21,26.47 103.18,24.44 v103.18,16.41
  Bottom 0.203: 71.78,42.22 IC3.13 | v71.78,39.68 77.27,39.68 80.52,36.43 82.35,36.43 v83.67,35.11 | v90.07,29.62 91.5,29.62 92.31,30.43 95.97,30.43 96.68,31.14 v100.44,31.14 | v103.18,16.41 96.37,9.61 88.24,9.61 85.81,7.17 78.69,7.17 C9.2
INS11  (via drill 0.51)
  Top 0.203: v81.84,52.78 91.19,52.78 97.69,46.28 C12.2 | R1.P$5 105.31,34.19 107.04,35.92 v107.04,37.75 107.04,41.61 105.72,42.93 105.01,42.93 v101.76,46.18
  Bottom 0.203: v81.84,52.78 80.83,51.77 79.4,51.77 75.14,47.5 75.14,45.16 74.22,44.25 71.48,44.25 69.55,42.32 69.24,42.32 IC3.14 | v107.04,37.75 109.07,35.72 109.07,21.09 94.24,6.25 SW4.D | v101.76,46.18 97.79,46.18 C12.2
INS12  (via drill 0.51)
  Top 0.203: C23.2 2.9,64.06 2.9,65.99 1.78,67.11 BUTTON1.P$3 1.68,67.21 1.68,69.75 | 1.68,69.75 1.68,77.27 BUTTON1.P$4 | v78.08,40.09 v76.86,38.87 | v95.46,38.76 96.07,38.76 97.39,40.09 99.62,40.09 v100.03,39.68 | 1.68,69.75 13.77,69.75 14.28,70.26 v16.21,70.26 | v37.24,68.74 37.24,68.33 39.58,65.99 39.58,56.14 43.84,51.87 43.84,48.21 44.66,47.4 44.66,43.84 46.69,41.81 46.69,41.3 47.3,40.7 50.96,40.7 51.57,40.09 64.57,40.09 69.14,35.51 69.14,34.7 IC3.3
  Bottom 0.203: v76.86,38.87 73.11,38.87 69.24,35.01 69.24,34.7 IC3.3 | v78.08,40.09 78.08,39.78 80.42,37.44 84.08,37.44 84.69,38.05 94.75,38.05 v95.46,38.76 | v100.03,39.68 102.06,41.71 R2.P$8 | v16.21,70.26 19.36,73.41 23.83,73.41 24.64,72.6 33.38,72.6 v37.24,68.74
INS13  (via drill 0.51)
  Top 0.203: 9.3,48.21 BUTTON2.P$4 9.3,48.31 v9.3,53.5 | 9.3,58.27 BUTTON2.P$3 9.4,58.37 11.74,60.71 11.74,61.42 C24.2 11.84,61.52 17.94,61.52 20.68,64.27 20.68,67.42 17.43,70.67 17.43,79.51 17.33,79.61 17.33,81.23 17.84,81.74 17.84,82.45 18.55,83.16 65.18,83.16 v77.68,70.67 | v73.92,36.83 76.15,36.83 78.8,39.48 81.54,39.48 83.47,41.41 v83.47,42.42 | v84.89,43.84 96.47,43.84 96.68,44.05 96.68,44.15 97.29,44.76 v99.62,44.76
  Bottom 0.203: v9.3,53.5 9.3,58.27 BUTTON2.P$3 | v73.92,36.83 71.78,34.7 IC3.4 | v83.47,42.42 v84.89,43.84 84.79,43.84 83.47,45.16 83.47,57.26 77.68,63.05 v77.68,70.67 | v99.62,44.76 101.55,44.76 101.96,44.35 R2.P$9
INS14
  Top 0.203: C15.2 98.1,61.22 98.1,60.71 100.44,58.37 BUTTON3.P$1 100.44,58.27 100.44,48.21 BUTTON3.P$2 100.44,48.11 100.44,40.49 | 100.44,40.49 103.99,40.49 105.21,41.71 R1.P$8 | 100.44,40.49 84.59,40.49 83.16,39.07 79,39.07 74.63,34.7 74.32,34.7 IC3.5
INS15
  Top 0.203: C16.2 106.84,63.86 106.84,65.89 108.06,67.11 BUTTON4.P$4 108.06,67.21 108.06,77.27 BUTTON4.P$3
  Bottom 0.203: IC3.6 76.86,34.6 77.27,34.6 79,32.87 95.36,32.87 97.69,35.21 98.2,35.21 98.81,35.82 98.81,36.73 97.59,37.95 97.29,37.95 96.68,38.56 96.68,39.37 97.79,40.49 99.01,40.49 101.66,43.13 104.09,43.13 105.21,44.25 R1.P$9 105.31,44.35 105.31,61.32 106.73,62.74 106.73,63.76 C16.2
N$1
  Top 0.203: R8.1 39.78,54 39.78,55.33 39.17,55.94 39.17,62.03 36.63,64.57 36.63,67.21 35.21,68.64 U$9.5
N$3
  Top 0.203: LED0.A 12.76,26.67 12.76,24.84 15.7,21.9 17.43,21.9 17.63,21.7 17.63,20.07 18.34,19.36 26.78,19.36 26.88,19.26 R4.2
N$4  (via drill 0.51)
  Top 0.203: v60.1,25.45 61.83,25.45 63.76,23.52 64.06,23.52 IC1.13
  Bottom 0.203: v60.1,25.45 60.1,25.66 53.6,32.16 43.95,32.16 37.04,25.25 31.45,25.25 29.42,23.22 U1.6
N$5
  Bottom 0.203: IC1.19 79.3,23.42 79,23.42 76.05,20.48 72.5,20.48 68.84,16.82 67.62,16.82 67.11,16.31 63.76,16.31 63.05,17.02 49.64,17.02 46.18,20.48 46.18,21.7 44.66,23.22 U1.12
N$6  (via drill 0.51)
  Top 0.203: v57.87,8.39 v62.34,8.39
  Bottom 0.203: v62.34,8.39 72.9,8.39 80.42,15.9 80.42,24.64 79.81,25.25 79,25.25 77.27,23.52 76.86,23.52 IC1.18 | v57.87,8.39 50.04,16.21 47.4,16.21 43.64,19.97 43.64,21.7 42.12,23.22 U1.11
N$7  (via drill 0.51)
  Top 0.203: v62.74,18.75 60.3,18.75 58.17,20.88 48.42,20.88 46.28,18.75 v42.32,18.75
  Bottom 0.203: v62.74,18.75 64.37,17.12 66.7,17.12 67.92,18.34 68.84,18.34 73.92,23.42 74.22,23.42 IC1.17 | v42.32,18.75 41.2,19.87 41.2,21.59 39.58,23.22 U1.10
N$8  (via drill 0.51)
  Top 0.203: v77.37,16.92 75.75,16.92 71.78,20.88 71.78,23.42 IC1.16 | v68.33,10.82 68.33,11.43 65.59,14.18 65.59,19.05 64.88,19.77 64.88,22 65.59,22.71 65.59,26.17 64.27,27.49 41.3,27.49 37.04,23.22 U1.9
  Bottom 0.203: v77.37,16.92 77.37,14.08 74.12,10.82 v68.33,10.82
N$9
  Top 0.203: IC1.15 69.14,23.52 69.14,23.83 64.57,28.4 55.43,28.4 54.51,29.32 53.7,29.32 52.28,27.89 39.17,27.89 34.5,23.22 U1.8
N$10  (via drill 0.51)
  Top 0.203: v54.11,28.5 54.61,28 64.37,28 66.6,25.76 66.6,23.52 IC1.14 | v52.89,29.72 38.87,29.72 38.36,30.23 36.02,30.23 31.96,26.17 31.96,23.22 U1.7
  Bottom 0.203: v52.89,29.72 v54.11,28.5
N$11  (via drill 0.51)
  Top 0.203: v47.6,35.21 46.18,36.63 40.29,36.63 26.88,23.22 U1.5
  Bottom 0.203: v47.6,35.21 51.57,35.21 61.52,25.25 61.52,23.52 IC1.12
N$12
  Top 0.203: IC2.9 85.4,41.71 83.06,44.05 81.13,44.05 79.4,42.32 IC3.10
N$13
  Bottom 0.203: R3.2 58.37,19.16 61.12,19.16 62.84,17.43 63.45,17.43 64.16,16.72 66.91,16.72 68.13,17.94 69.35,17.94 73.11,21.7 74.73,21.7 75.75,22.71 75.75,24.54 78.29,27.08 82.15,27.08 82.76,27.69 95.86,27.69 96.78,26.78 LED1.A
N$14
  Top 0.203: D1.A 49.03,64.98 50.55,64.98 51.46,64.06 55.33,64.06 56.34,65.08 56.34,66.91 57.05,67.62 57.87,67.62 59.9,65.59 59.9,65.18 OK1.3
  Bottom 0.203: U$10.5 14.89,68.74 14.89,70.16 18.55,73.82 24.03,73.82 24.84,73 35.41,73 40.09,68.33 43.74,68.33 45.67,66.4 47.6,66.4 48.92,65.08 D1.A
N$15
  Bottom 0.203: R5.1 46.18,65.38 45.27,65.38 42.73,67.92 36.43,67.92 35.82,67.31 26.37,67.31 25.05,68.64 U$10.4
N$16
  Top 0.203: R7.1 51.77,65.18 51.06,65.18 47.6,68.64 45.37,68.64 U$9.4
N$17
  Top 0.203: R10.1 84.59,65.08 84.59,67.21 86.01,68.64 U$7.4
N$18
  Top 0.203: D2.C 65.59,57.76 66.2,57.15 68.03,57.15 R6.2 68.03,57.26 73.61,62.84 73.61,65.08 OK2.2
N$19
  Top 0.203: U$8.5 55.63,68.64 58.98,68.64 60,67.62 63.35,67.62 65.48,65.48 D2.A
  Bottom 0.203: OK2.3 76.15,65.08 75.14,65.08 73.72,63.66 67.31,63.66 65.59,65.38 D2.A
N$20
  Top 0.203: IC6.8 22.1,65.38 22.1,75.44 17.73,79.81 17.73,80.72 18.95,81.94 DAC.3
N$21
  Top 0.203: R6.1 68.03,64.77 68.03,66.4 65.79,68.64 U$8.4
N$22
  Top 0.203: R9.1 81.84,65.08 78.29,68.64 75.95,68.64 U$7.5
N$23  (via drill 0.6)
  Top 0.406: v95.75,44.75 95.72,44.78 arc45 95.55,44.85 80.95,44.85 80.32,44.22 arc-45 80.05,44.15 61.05,44.15 59.07,42.07 arc-45 58.9,42 S1.3
  Bottom 0.406: v95.75,44.75 95.75,68.38 96.98,68.38 98.65,70.05 98.65,73.45 | 98.65,73.45 98.65,73.65 J1.3 | 98.65,73.45 100.05,73.45 J1.2
N$24
  Top 0.203: IC6.6 17.02,65.38 17.02,79.3 16.51,79.81 16.51,81.94 DAC.4
N$25
  Top 0.203: IC4.2 40.7,57.66 46.38,51.97 46.38,49.94 48.11,48.21 70.06,48.21 71.17,47.1 U$2.P$4
N$26
  Top 0.203: R5.2 46.28,57.66 48.72,57.66 48.92,57.46 D1.C 49.03,57.46 49.33,57.46 56.95,65.08 57.36,65.08 OK1.2
N$27
  Top 0.203: R13.S1 91.29,58.58 91.29,63.55 R13.S 91.19,63.66 84.38,63.66 83.47,64.57 83.47,64.88 79.3,69.04 78.08,69.04 66.7,80.42 30.03,80.42 28.1,78.49 28.1,78.08 U$1.3
N$28  (via drill 0.51)
  Top 0.203: v30.43,52.28 30.43,57.66 IC4.6 | v38.87,49.23 40.29,49.23 42.12,47.4 42.12,44.96 v43.44,43.64
  Bottom 0.203: v30.43,52.28 33.48,49.23 v38.87,49.23 | v43.44,43.64 48.62,43.64 52.58,39.68 52.68,39.68 53.5,38.87 53.5,38.05 55.12,36.43 56.14,36.43 63.05,43.34 63.05,46.49 63.55,46.99 U$2.P$7
N$29  (via drill 0.51)
  Top 0.203: v57.15,74.22 38.66,74.22 34.19,69.75 32.77,69.75 28.4,65.38 28,65.38 IC4.10 | v63.66,58.37 v58.88,63.15
  Bottom 0.203: v57.15,74.22 57.15,69.75 58.88,68.03 v58.88,63.15 | v63.66,58.37 63.66,52.38 63.86,52.18 63.86,49.84 61.12,47.1 U$2.P$8
N$30
  Top 0.203: IC4.4 35.62,57.66 35.62,57.15 38.76,54 38.76,53.6 39.58,52.78 40.39,52.78 41.3,51.87 41.3,49.03 43.23,47.1 U$2.P$15
N$31  (via drill 0.51)
  Top 0.203: v36.83,61.52 33.08,65.28 IC4.12
  Bottom 0.203: v36.83,61.52 36.83,61.12 39.58,58.37 39.58,55.73 41,54.31 41,47.3 40.8,47.1 U$2.P$16
PA0  (via drill 0.51)
  Top 0.203: v75.14,28.5 75.34,28.71 75.34,31.75 76.46,32.87 77.27,32.87 79,31.14 79.3,31.14 IC1.2 | v64.77,25.76 63.45,25.76 62.13,27.08 54.92,27.08 52.28,24.44 48.31,24.44 47.2,23.32 U1.13 | v30.03,10.21 28.81,10.21 26.98,8.39 14.79,8.39 11.74,5.34 9.5,5.34 XIO.3
  Bottom 0.203: v75.14,28.5 72.09,28.5 70.87,27.28 66.3,27.28 v64.77,25.76 | v30.03,10.21 30.23,10.21 33.48,13.47 33.48,20.48 35.82,22.81 35.82,23.73 36.53,24.44 45.98,24.44 47.1,23.32 U1.13
PA1  (via drill 0.51)
  Top 0.203: v77.88,20.78 77.88,28.2 76.86,29.21 76.86,31.04 IC1.3 | v63.96,10.01 58.68,10.01 52.89,15.8 v52.89,20.07 52.68,20.27 50.04,20.27 45.47,15.7 45.47,14.89 39.17,8.59 v39.17,7.98 | v27.79,7.98 14.99,7.98 11.13,4.12 8.89,4.12 7.78,5.24 6.96,5.24 XIO.4
  Bottom 0.203: v77.88,20.78 77.88,19.05 77.68,18.85 77.68,17.84 78.19,17.33 78.19,14.28 73.92,10.01 v63.96,10.01 | v52.89,20.07 49.74,23.22 U1.14 | v39.17,7.98 v27.79,7.98
PA2  (via drill 0.51)
  Top 0.203: v74.83,19.66 75.34,20.17 75.34,24.64 74.32,25.66 74.32,31.04 IC1.4 | v63.05,15.19 61.12,17.12 58.37,17.12 v55.43,20.07
  Bottom 0.203: v74.83,19.66 74.22,19.66 70.87,16.31 69.55,16.31 69.24,16.01 68.03,16.01 67.21,15.19 v63.05,15.19 63.05,11.43 59.19,7.57 57.46,7.57 56.95,8.08 55.33,8.08 54.72,7.47 54.72,6.96 54,6.25 54,1.88 53.09,0.97 44.56,0.97 43.84,1.68 43.84,3.61 42.93,4.53 39.48,4.53 35.92,0.97 16.62,0.97 15.9,1.68 15.9,2.6 10.72,7.78 9.5,7.78 XIO.5 | v55.43,20.07 52.28,23.22 U1.15
PA3  (via drill 0.51)
  Top 0.203: v69.24,36.83 70.26,35.82 70.26,33.99 71.68,32.57 71.68,31.14 IC1.5 | 60,36.83 57.36,36.83 55.73,38.46 54.82,38.46 U1.17 | 60,36.83 v65.99,36.83 | v61.73,26.27 59.69,26.27 55.43,22 39.17,22 37.95,20.78 34.6,20.78 30.33,16.51 23.42,16.51 17.73,10.82 10.93,10.82 10.21,11.54 8.89,11.54 8.18,10.82 8.18,10.01 6.96,8.79 6.96,7.88 XIO.6 | 60,36.83 v60,34.09
  Bottom 0.203: v65.99,36.83 v69.24,36.83 | v61.73,26.27 61.73,28.71 60.1,30.33 60.1,33.99 v60,34.09
PA4  (via drill 0.51)
  Top 0.203: IC1.6 69.14,31.14 69.14,32.57 67.72,33.99 67.72,36.33 64.37,39.68 53.4,39.68 52.28,38.56 U1.18 | v32.67,16.41 26.67,10.42 9.5,10.42 XIO.7 | v51.87,25.25 v45.67,25.25
  Bottom 0.203: v32.67,16.41 32.67,22.2 33.28,22.81 33.28,23.73 34.4,24.84 45.27,24.84 v45.67,25.25 | v51.87,25.25 55.02,25.25 58.58,21.7 62.03,21.7 63.05,22.71 63.05,25.25 66.5,28.71 68.43,28.71 69.14,29.42 69.14,31.04 IC1.6
PA5  (via drill 0.51)
  Top 0.203: v56.24,34.6 56.24,33.38 v55.83,32.97 | v11.74,9.2 25.15,9.2 25.56,8.79 26.37,8.79 v37.14,19.56 | v37.14,21.59 38.36,22.81 38.36,23.73 41.3,26.67 v48.52,26.67 | v53.19,31.35 56.65,31.35 v57.05,31.75
  Bottom 0.203: v56.24,34.6 58.17,36.53 59.19,36.53 59.8,35.92 59.8,35.51 62.44,32.87 64.57,32.87 66.3,31.14 66.6,31.14 IC1.7 | U1.19 49.74,38.46 55.22,32.97 v55.83,32.97 v57.05,31.75 | v11.74,9.2 8.89,9.2 7.78,10.32 6.96,10.32 XIO.8 | v37.14,21.59 v37.14,19.56 | v53.19,31.35 v48.52,26.67
PA6  (via drill 0.51)
  Top 0.203: IC1.8 64.06,31.14 63.76,31.14 61.62,33.28 58.78,33.28 55.63,36.43 49.23,36.43 47.2,38.46 U1.20 | v38.16,28.6 33.28,23.73 33.28,22.81 27.39,16.92 12.14,16.92 10.72,15.5 10.72,15.09 9.5,13.87 9.5,12.96 XIO.9
  Bottom 0.203: v38.16,28.6 39.78,28.6 47.1,35.92 47.1,38.46 U1.20
PA7  (via drill 0.51)
  Top 0.203: IC1.9 61.52,31.14 61.22,31.14 59.49,32.87 56.95,32.87 56.24,32.16 51.87,32.16 46.79,37.24 45.88,37.24 44.66,38.46 U1.21 44.56,38.46 43.34,37.24 40.29,37.24 28.4,25.35 v27.39,25.35 | v20.98,18.14 v13.36,18.14
  Bottom 0.203: v13.36,18.14 10.72,15.5 10.72,15.09 9.91,14.28 9.1,14.28 7.78,12.96 6.96,12.96 XIO.10 | v20.98,18.14 25.66,22.81 25.66,23.63 v27.39,25.35
PB0
  Bottom 0.203: XIO.34 6.96,43.44 7.78,43.44 9.1,44.76 18.14,44.76 26.37,52.99 27.49,52.99 29.01,54.51 JP1.7
PB1
  Top 0.203: IC6.3 17.12,57.66 17.43,57.66 19.26,55.83 20.17,55.83 21.39,54.61 JP1.4 | IC4.7 27.89,57.66 27.59,57.66 25.76,55.83 22.71,55.83 21.49,54.61 JP1.4 | XIO.33 9.5,43.44 20.98,54.92 JP1.4
PB2
  Top 0.203: XIO.32 6.96,40.9 6.96,41.81 8.18,43.03 8.18,43.84 9.1,44.76 9.91,44.76 12.65,47.5 12.65,55.83 14.48,57.66 IC6.4
  Bottom 0.203: 24.34,55.83 25.25,55.83 26.47,54.61 JP1.6 | 24.34,55.83 16.72,55.83 14.89,57.66 14.58,57.66 IC6.4 | 24.34,55.83 24.34,58.78 25.35,59.8 25.35,65.28 IC4.9
PB3
  Top 0.203: XIO.31 9.5,40.9 10.32,40.9 23.93,54.51 JP1.5
PC0
  Bottom 0.203: XIO.18 6.96,23.02 7.78,23.02 8.89,21.9 12.65,21.9 20.68,29.93 25.15,29.93 29.42,34.19 29.42,38.36 U1.27
PC1  (via drill 0.51)
  Top 0.203: v28,31.55 v25.56,31.55
  Bottom 0.203: v25.56,31.55 21.09,31.55 17.33,27.79 16.11,27.79 11.43,23.12 9.5,23.12 XIO.17 | v28,31.55 28,32.16 30.64,34.8 30.64,37.14 31.86,38.36 U1.26
PC2  (via drill 0.51)
  Top 0.203: v11.13,32.16 12.14,32.16 17.94,37.95 17.94,39.88 19.66,41.61 19.66,43.64 24.64,48.62 v26.98,48.62
  Bottom 0.203: v11.13,32.16 11.03,32.06 9.1,32.06 8.18,31.14 8.18,30.33 7.37,29.52 6.56,29.52 5.64,28.6 5.64,22.61 6.86,21.39 6.86,20.58 XIO.16 | v26.98,48.62 26.98,48.01 29.42,45.57 29.42,44.96 31.14,43.23 35.21,43.23 36.73,41.71 36.73,41.2 39.48,38.46 U1.23
PC3  (via drill 0.51)
  Top 0.203: v30.74,25.86 30.74,20.98 27.08,17.33 12.96,17.33 9.81,20.48 9.5,20.48 XIO.15
  Bottom 0.203: v30.74,25.86 30.74,30.03 32.57,31.86 32.57,36.53 34.4,38.36 U1.25
PC4
  Bottom 0.203: XIO.14 6.96,18.04 7.78,18.04 9.1,19.36 10.72,19.36 15.7,24.34 23.12,24.34 24.24,23.22 U1.4
PC5  (via drill 0.51)
  Top 0.203: v12.96,23.42 11.43,21.9 9.1,21.9 8.18,20.98 8.18,20.07 9.4,18.85 9.4,18.04 XIO.13 | v22,30.74 22,31.35 26.06,35.41 26.06,37.65 26.78,38.36 U1.28
  Bottom 0.203: v12.96,23.42 13.57,23.42 20.88,30.74 v22,30.74
PC6
  Bottom 0.203: XIO.12 6.96,15.5 7.78,15.5 9.1,16.82 10.52,16.82 15.6,21.9 20.48,21.9 21.7,23.12 U1.3
PC7
  Top 0.203: XIO.11 9.4,15.5 9.4,16.31 8.08,17.63 8.08,18.44 7.17,19.36 6.35,19.36 5.64,20.07 5.64,31.14 6.35,31.86 10.21,31.86 10.72,31.35 12.14,31.35 19.16,38.36 U1.31
PD7  (via drill 0.51)
  Top 0.203: v25.35,49.43 27.79,51.87 27.79,55.02 29.01,56.24 29.01,58.37 30.43,59.8 30.43,65.28 IC4.11 | v25.35,45.37 22.2,42.22 22.2,39.58 22.91,38.87 22.91,35.41 v16.11,28.6
  Bottom 0.203: v25.35,45.37 v25.35,49.43 | v16.11,28.6 13.16,25.66 9.5,25.66 XIO.19
PE3  (via drill 0.51)
  Top 0.203: v20.78,60 19.66,58.88 19.66,57.76 IC6.2 | v20.58,62.84 19.87,62.84 17.33,60.3 13.67,60.3 4.42,51.06 4.42,16.21 6.56,14.08 7.37,14.08 8.08,13.36 8.08,12.45 7.17,11.54 6.35,11.54 5.64,10.82 5.64,7.37 6.35,6.66 7.37,6.66 8.18,7.47 8.18,8.28 9.1,9.2 10.52,9.2 11.33,10.01 25.56,10.01 v25.96,9.61 | v41.71,9.61 42.22,9.61 42.93,10.32 v44.35,10.32
  Bottom 0.203: v20.78,60 20.78,62.64 v20.58,62.84 | v25.96,9.61 29.42,9.61 29.62,9.4 30.43,9.4 30.64,9.61 v41.71,9.61 | v44.35,10.32 45.06,10.32 52.58,2.8 PWML.6
PE4
  Top 0.203: R3.1 50.75,19.16 50.75,15.5 50.85,15.4 50.85,8.89 45.06,3.1 45.06,2.8 PWML.3
PE5
  Bottom 0.203: R4.1 34.6,19.16 35.41,19.16 42.52,12.04 42.52,6.66 44.66,4.53 45.77,4.53 47.5,2.8 PWML.4
PG0
  Bottom 0.203: XIO.22 6.96,28.2 7.78,28.2 9.1,29.52 9.91,29.52 11.94,31.55 11.94,36.12 12.35,36.53 22.41,36.53 24.24,38.36 U1.29
PG1  (via drill 0.51)
  Top 0.203: v28.6,34.6 33.18,34.6 36.94,38.36 U1.24
  Bottom 0.203: v28.6,34.6 16.62,34.6 10.21,28.2 9.5,28.2 XIO.21
PG2  (via drill 0.51)
  Top 0.203: v51.97,28.91 39.07,28.91 38.56,29.42 v36.43,29.42 | v26.47,32.47 v33.38,32.47
  Bottom 0.203: v51.97,28.91 57.36,23.52 58.98,23.52 IC1.11 | v33.38,32.47 v36.43,29.42 | v26.47,32.47 17.43,32.47 12.76,27.79 10.72,27.79 9.71,26.78 8.08,26.78 6.96,25.66 XIO.20
PL0  (via drill 0.51)
  Top 0.203: v55.73,37.24 51.77,37.24 50.85,38.16 50.85,38.97 49.53,40.29 38.36,40.29 37.75,39.68 36.53,39.68 35.62,38.76 35.62,37.95 33.79,36.12 v27.28,36.12 | v12.76,35.72 11.13,35.72 9.71,37.14 8.69,37.14 7.57,38.26 6.96,38.26 XIO.30
  Bottom 0.203: v55.73,37.24 59.69,41.2 59.69,47.3 61.32,48.92 61.32,51.77 61.93,52.38 61.93,54.21 61.42,54.72 61.42,57.87 64.98,61.42 76.36,61.42 83.06,54.72 83.06,46.79 81.94,45.67 81.94,42.32 IC3.9 | v27.28,36.12 13.16,36.12 v12.76,35.72
PL1  (via drill 0.51)
  Top 0.203: v68.03,29.52 68.53,29.52 69.14,28.91 70.87,28.91 73.21,26.57 73.21,20.07 75.85,17.43 76.66,17.43 77.68,18.44 77.68,18.85 78.39,19.56 83.67,19.56 87.43,23.32 v89.26,23.32 | v7.37,50.35 5.64,48.62 5.64,40.39 6.35,39.68 7.17,39.68 8.49,38.36 9.4,38.36 XIO.29 | v31.55,75.14 59.39,75.14 v60.3,74.22 | v63.55,61.22 63.55,59.69 64.47,58.78 64.47,54.61 v66.5,52.58
  Bottom 0.203: v68.03,29.52 68.03,31.96 67.11,32.87 66.3,32.87 64.57,34.6 64.16,34.6 IC3.1 64.67,34.6 65.18,35.11 65.18,43.03 66.2,44.05 66.4,44.05 67.31,44.96 67.31,47.6 66.5,48.42 v66.5,52.58 | v89.26,23.32 90.48,24.54 92.41,24.54 93.02,23.93 IC2.1 | v7.37,50.35 12.25,55.22 12.25,60.51 13.36,61.62 13.36,69.35 18.44,74.43 23.63,74.43 24.34,75.14 v31.55,75.14 | v60.3,74.22 63.55,70.97 v63.55,61.22
PL2  (via drill 0.51)
  Top 0.203: v79.51,28.71 80.12,28.71 83.47,25.35 v87.84,25.35 | v36.83,36.83 37.04,36.83 38.26,38.05 38.26,38.87 39.07,39.68 48.21,39.68 v48.42,39.48 | v60,29.21 64.47,29.21 65.59,30.33 65.59,33.58 66.6,34.6 IC3.2
  Bottom 0.203: v79.51,28.71 78.29,29.93 78.29,31.86 77.27,32.87 76.46,32.87 75.75,33.58 75.75,36.22 74.32,37.65 72.5,37.65 70.67,35.82 70.67,33.99 69.55,32.87 68.84,32.87 67.11,34.6 66.7,34.6 IC3.2 | v87.84,25.35 92,25.35 93.02,26.37 IC2.2 | v36.83,36.83 35.72,37.95 35.72,38.87 34.29,40.29 24.44,40.29 23.02,38.87 23.02,37.95 22,36.94 8.89,36.94 7.78,35.82 6.96,35.82 XIO.28 | v48.42,39.48 48.42,38.05 50.85,35.62 51.97,35.62 58.37,29.21 v60,29.21
PL3
  Top 0.203: U$1.4 30.54,77.98 30.54,72.19 25.45,67.11 25.05,67.11 23.63,65.69 23.63,64.06 19.05,59.49 14.08,59.49 5.24,50.65 5.24,38.26 6.56,36.94 8.28,36.94 9.4,35.82 XIO.27
PL4  (via drill 0.51)
  Top 0.203: v24.74,74.32 24.74,72.7 23.22,71.17 23.22,64.27 18.85,59.9 13.87,59.9 4.83,50.85 4.83,35.31 6.86,33.28 XIO.26
  Bottom 0.203: v24.74,74.32 31.96,74.32 35.62,77.98 U$1.6
PL5  (via drill 0.51)
  Top 0.203: v35.92,52.68 35.92,49.64 v34.7,48.42 | v31.45,48.42 30.33,48.42 v25.15,43.23 | v14.28,37.75 14.28,36.02 11.54,33.28 9.5,33.28 XIO.25
  Bottom 0.203: v35.92,52.68 35.92,54.61 38.05,56.75 38.05,57.66 IC4.3 | v31.45,48.42 v34.7,48.42 | v25.15,43.23 25.15,42.93 24.34,42.12 24.34,41.3 23.02,39.98 16.51,39.98 v14.28,37.75
PL6
  Top 0.203: XIO.24 6.96,30.64 7.78,30.64 8.89,29.52 11.54,29.52 12.35,30.33 13.16,30.33 19.16,24.34 19.16,23.22 U1.2
PL7
  Top 0.203: IC4.5 32.97,57.66 32.97,53.4 26.17,46.59 23.22,46.59 21.8,45.16 21.8,40.19 20.38,38.76 20.38,37.85 13.26,30.74 9.5,30.74 XIO.23
RXD1  (via drill 0.51)
  Top 0.203: R12.1 58.58,53.8 58.58,56.14 59.9,57.46 OK1.6 | v25.66,71.78 25.66,72.39 29.42,76.15 29.42,79.2 30.23,80.01 56.44,80.01 57.36,79.1 57.36,76.76 58.17,75.95 v59.49,75.95
  Bottom 0.203: v25.66,71.78 23.83,71.78 18.55,66.5 18.55,64.67 12.65,58.78 12.65,55.02 8.18,50.55 8.18,45.57 7.37,44.76 6.56,44.76 2.8,41 2.8,15.29 6.35,11.74 9.71,11.74 10.62,10.82 11.33,10.82 12.55,9.61 12.55,8.08 15.5,5.13 19.46,5.13 21.8,2.8 22.1,2.8 COMMUNICATION.3 | v59.49,75.95 59.49,72.8 59.29,72.6 59.29,68.74 61.02,67.01 61.02,58.58 60,57.56 OK1.6
RXD2  (via drill 0.51)
  Top 0.203: R11.1 68.53,53.8 72.9,53.8 76.15,57.05 76.15,57.46 OK2.6 | v60.2,3 57.76,0.56 29.72,0.56 27.59,2.7 27.28,2.7 COMMUNICATION.5 | v83.16,26.88 83.16,27.59 80.83,29.93 v80.83,38.26
  Bottom 0.203: v60.2,3 60.2,3.41 61.93,5.13 70.26,5.13 83.16,18.04 v83.16,26.88 | v80.83,38.26 80.83,39.37 80.32,39.88 80.32,41.1 80.83,41.61 80.83,45.16 82.66,46.99 82.66,53.19 80.83,55.02 78.39,55.02 76.25,57.15 76.25,57.46 OK2.6
TXD1  (via drill 0.51)
  Top 0.203: v40.19,43.23 38.87,41.91 38.87,41.41 37.55,40.09 33.79,40.09 v33.18,39.48 | v30.23,11.43 30.23,11.23 30.84,10.62 30.84,9.81 24.74,3.71 24.74,2.8 COMMUNICATION.4
  Bottom 0.203: v40.19,43.23 41.91,44.96 41.91,47.3 43.54,48.92 43.54,51.77 45.67,53.9 47.4,53.9 R8.2 | v33.18,39.48 33.18,37.75 31.04,35.62 31.04,30.94 28.2,28.1 28.2,13.47 v30.23,11.43
TXD2  (via drill 0.51)
  Top 0.203: v48.42,4.63 62.13,4.63 62.84,3.92 62.84,1.98 63.86,0.97 98,0.97 108.67,11.64 108.67,44.15 106.94,45.88 106.94,53.8 98.4,62.34 97.59,62.34 96.98,61.73 96.98,60.81 97.49,60.3 97.49,55.12 97.08,54.72 85.4,54.72 82.76,57.36 81.94,57.36 R9.2 | v46.59,5.85 46.18,5.44 46.18,5.34 45.98,5.13 v37.75,5.13
  Bottom 0.203: v48.42,4.63 47.81,4.63 v46.59,5.85 | v37.75,5.13 32.16,5.13 29.82,2.8 COMMUNICATION.6
VIN
  Bottom 0.305: POWER.8 54.75,51.01 S1.2

## Text on the board
tPlace: GND | 5v | Vb | Va | DB5 | DB7 | K | JP-LCD | HD44780 | GND | +5V | V0 | RS | R/W | E | DB4 | DB6 | A | BUTTON1 | BUTTON4 | 3FTH9 | 3FTH9 | BUTTON2 | VIN | BUTTON3 | 3FTH9 | 3FTH9 | 3V3 | GND | GND | 5V | JP LCD OLED | ADC3 | ADC2 | ADC2 | ADC1 | GND | GND | 20 | 0 | PB0 | PB1 | PWR SW | PB2 | PB3 | PL0 | PL1 | PL2 | PL3 | PL4 | PL5 | SRAM AS6C1008-55PCN | PL6 | PL7 | 128K x 8 | PG0 | PG1 | PG2 | PD7 | PC0 | PC1 | PC2 | PC3 | PC4 | PC5 | PC6 | PC7 | PA7 | PA6 | PA5 | PA4 | PA3 | PA2 | MEGACOMMAND 1.0.1a | PA1 | PA0 | PA0 | TXD1 | TXD2 | PE4 | PE5 | 5V | RXD1 | RXD2 | GND
bPlace: RXD1 | TXD1 | RXD2 | TXD2 | VIN | GND | 5V | 3V | GND | CLK | DO | DI | CS | CD | Micro SD